# Altium PCB Feather-ATMega328 - WIFI.PcbDoc
Units mm, origin at the board's own origin, x right, y up, seen from the top; angles counter-clockwise.
Board outline 50 x 25 mm, 2 copper layers (Top Layer, Bottom Layer); 54 components, 49 nets, 194 pads, 87 vias.
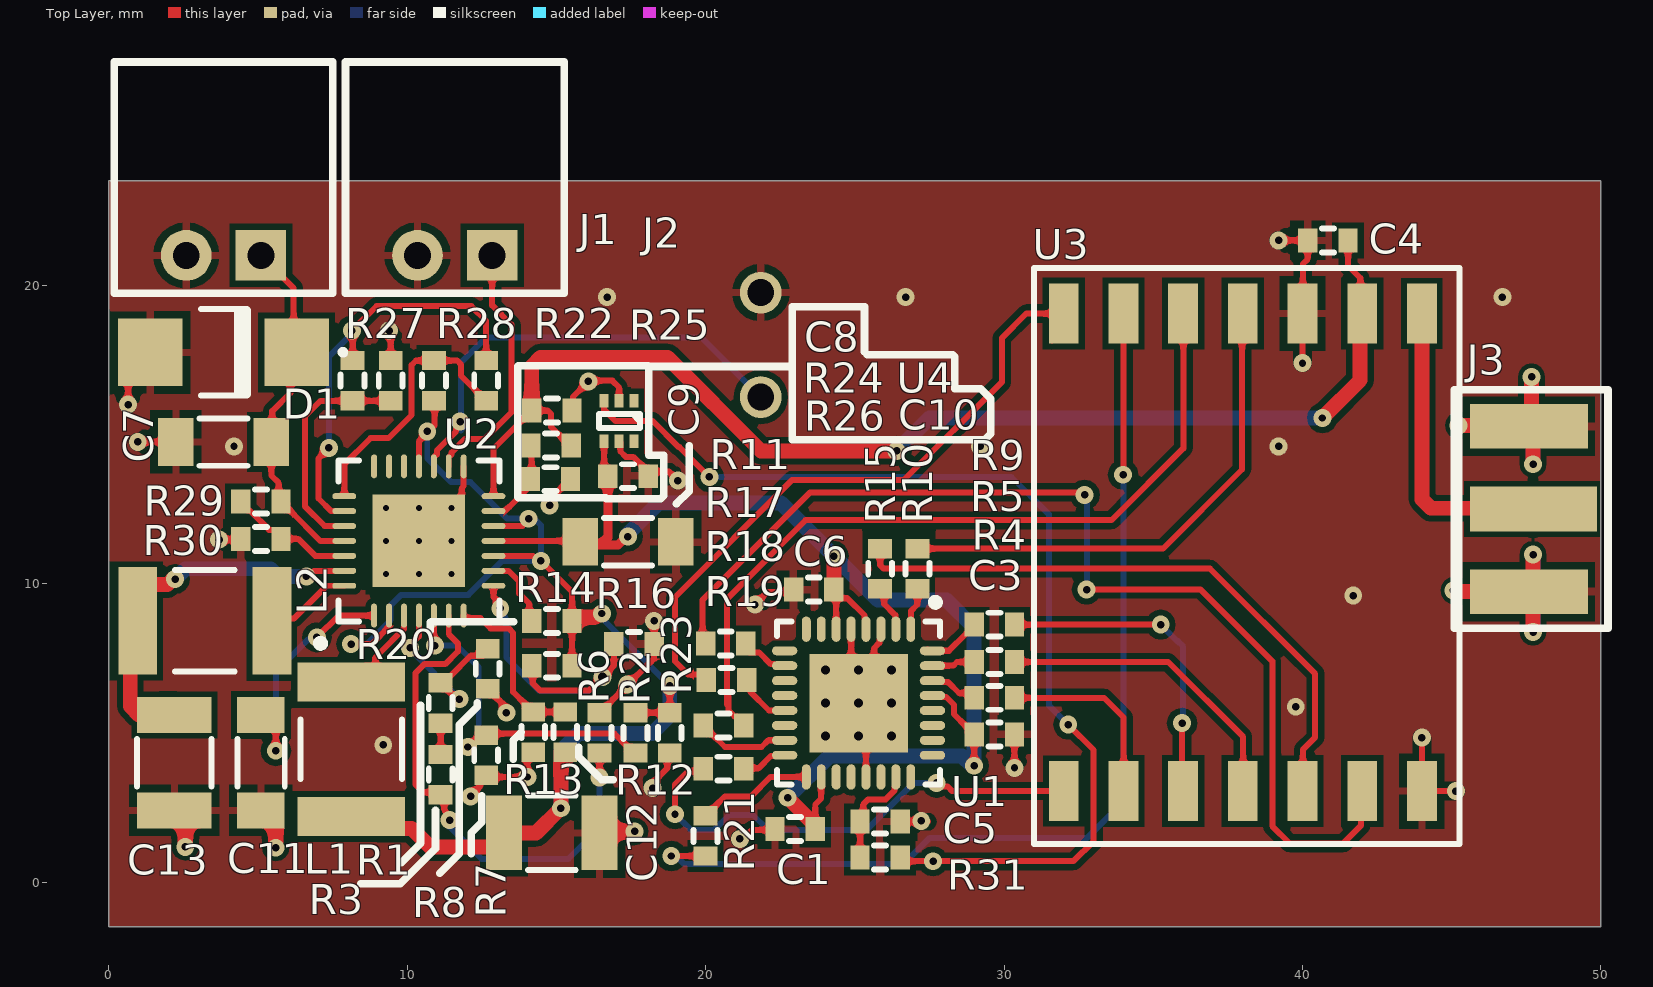
[diagram p0: Top Layer view]
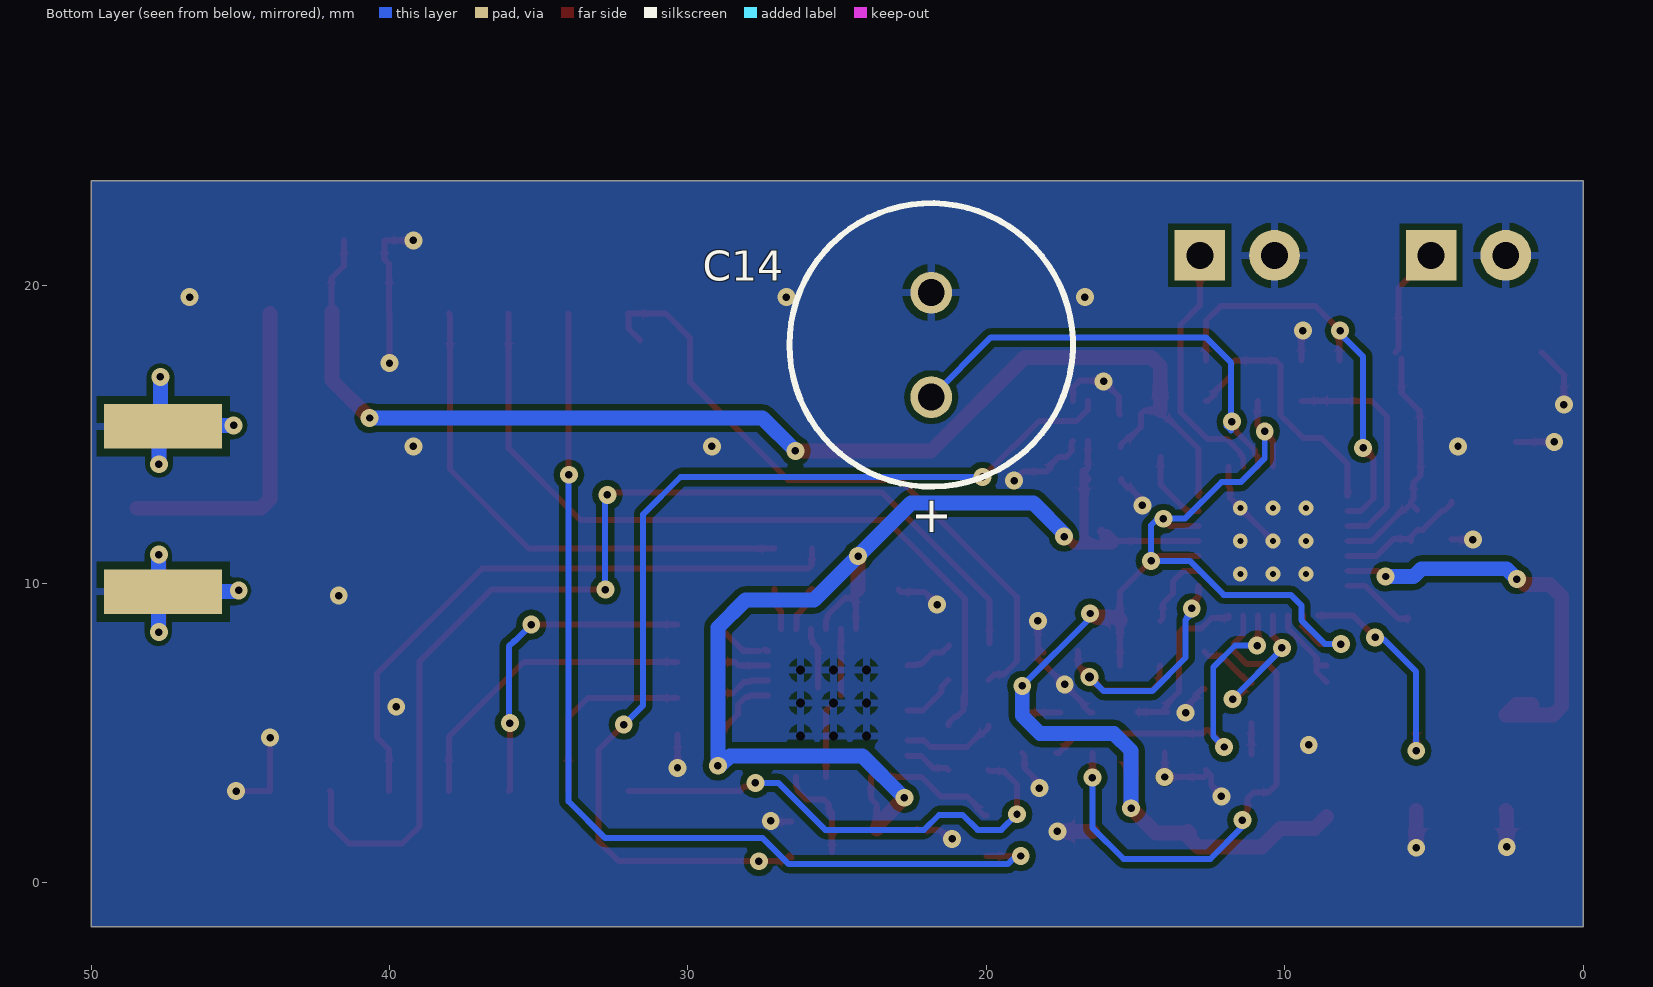
[diagram p1: Bottom Layer view, seen from below]
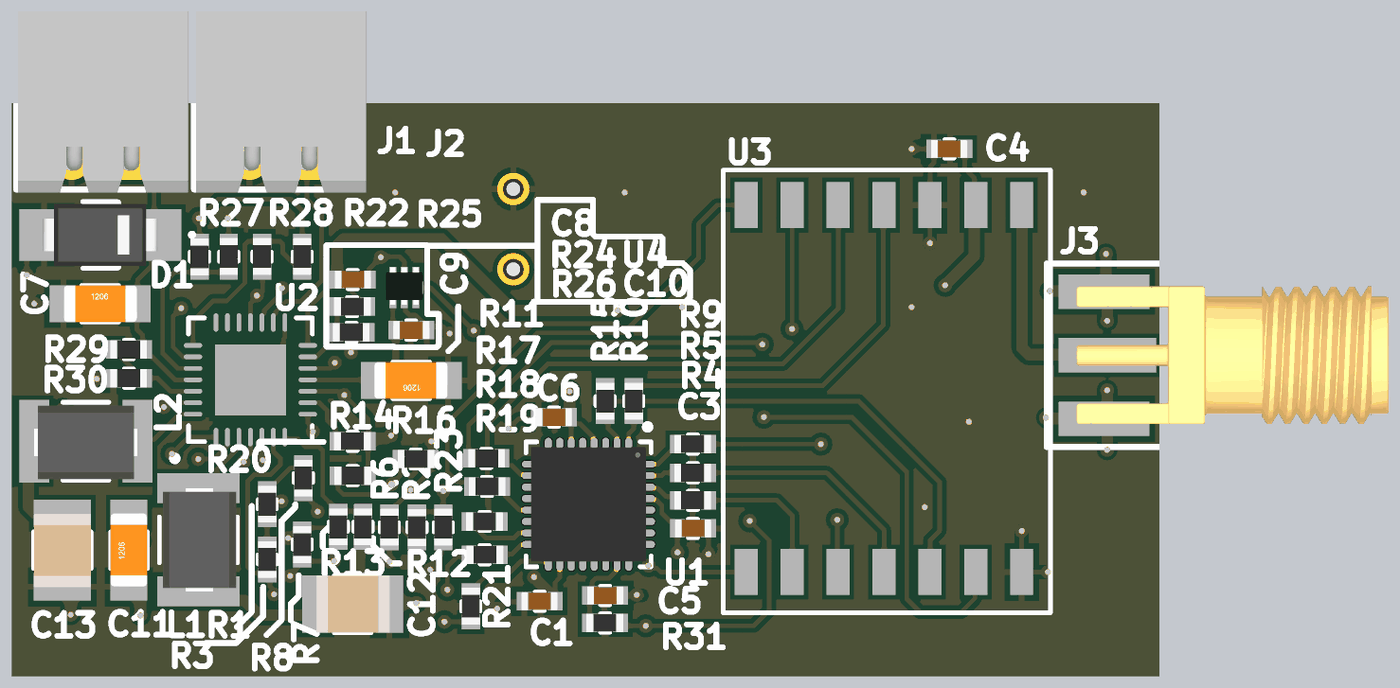
[diagram p2: 3D render of the assembled board from above, using the file's embedded part models]

## Layer stack, top to bottom
Top Solder: solder mask 0.0102, Solder Resist, Dk 3.5
Top Layer: signal copper 0.0356
Dielectric 1: dielectric 0.32, FR-4, Dk 4.8
Bottom Layer: signal copper 0.0356
Bottom Solder: solder mask 0.0102, Solder Resist, Dk 3.5

## Board outline
0,-1.5 50,-1.5 50,23.5 0,23.5

## Design rules (kind name [scope] priority, off if disabled: settings)
Clearance [All] p1: gap=0.2 ignorepadtopadclearanceinfootprint=FALSE except(0: Arc-Hole Track-Hole SMDPad-Hole THPad-Hole Via-Hole Fill-Hole Poly-Hole Region-Hole Text-Hole)
PlaneConnect [All] p1: pad.planeconnectstyle=Relief pad.reliefexpansion=0.508 pad.reliefentries=4 pad.reliefconductorwidth=0.254 pad.reliefairgap=0.254 via.planeconnectstyle=Direct via.reliefexpansion=0.508 via.reliefentries=4 via.reliefconductorwidth=0.254 via.reliefairgap=0.254
PolygonConnect [All] p1: thpad.connectstyle=Relief thpad.reliefconductorwidth=0.254 thpad.reliefentries=4 thpad.polygonreliefangle="90 Angle" thpad.airgapwidth=0.254 smdpad.connectstyle=Relief smdpad.reliefconductorwidth=0.254 smdpad.reliefentries=4 smdpad.polygonreliefangle="90 Angle" smdpad.airgapwidth=0.254 via.connectstyle=Direct via.reliefconductorwidth=0.254 via.reliefentries=4 via.polygonreliefangle="90 Angle" via.airgapwidth=0.254
RoutingVias [All] p1: holewidth=0.25 width=0.6 viastyle="Through Hole" minholewidth=0.25 minwidth=0.6 maxholewidth=0.25 maxwidth=0.6
SolderMaskExpansion [isVia] p1: expansion=0.102 istentingtop=TRUE
Width [All] p1: maxlimit=0.5 minlimit=0.2 preferedwidth=0.2 minimp=50.000000 maximp=50.000000 favimp=50.000000
29 further rules are at their usual default settings.

## Components (designator, comment, footprint, x,y, rotation, side; value= is the part's Value field where it differs from the comment)
C1 "Capacitor" C0603 23,1.775 r0 top value=100nF
C3 "Capacitor" C0603 29.675,4.95 r180 top value=100nF
C4 "Capacitor" C0603 40.85,21.5 r0 top value=100nF
C5 "Capacitor" C0603 25.85,2.025 r180 top value=100nF
C6 "Capacitor" C0603 23.625,9.8 r0 top value=100nF
C7 "Capacitor" C1206 3.85,14.75 r0 top value=22uF
C8 "Capacitor" C0603 14.85,15.8 r180 top value=100nF
C9 "Capacitor" C1206 17.4,11.4 r180 top value=10uF
C10 "Capacitor" C0603 17.4,13.6 r180 top value=100nF
C11 "Capacitor" C1206 5.1,4 r90 top value=22uF
C12 "Capacitor" C1210 14.85,1.65 r180 top value=10uF
C13 "Capacitor" C1210 2.2,4 r90 top value=10uF
C14 "Electrolytic" WCAP-STSC_D8xH20mm 21.85,18 r270 bottom value="3F 2,7V"
D1 "SMBJ5.0CA" DO-214AA 3.85,17.75 r180 top
J1 "1x2 Socket Header" "MOLEX 22-05-7025" 3.85,21 r0 top
J2 "1x2 Socket Header" "MOLEX 22-05-7025" 11.6,21 r0 top
J3 "132322" SMA_Edge_132322 47.735,12.5 r270 top
L1 "B82432T1103K" L1812-T 8.125,4.45 r270 top value="10uH 0,650A"
L2 "B82432T1103K" L1812-T 3.225,8.75 r180 top value="10uH 0,650A"
R1 "Resistor" R0603 11.125,6 r270 top value=4k7
R2 "Resistor" R0603 17.65,5 r90 top value=4k7
R3 "Resistor" R0603 11.125,3.6 r90 top value=4k7
R4 "Resistor" R0603 29.675,6.175 r0 top value=100R
R5 "Resistor" R0603 29.675,7.375 r0 top value=100R
R6 "Resistor" R0603 16.45,5 r270 top value=1k
R7 "Resistor" R0603 12.65,4.25 r90 top value=1k
R8 "Resistor" R0603 12.7,7.15 r90 top value=1k
R9 "Resistor" R0603 29.675,8.625 r0 top value=100R
R10 "Resistor" R0603 27.1,10.5 r90 top value=100R
R11 "Resistor" R0603 20.675,8 r180 top value=100R
R12 "Resistor" R0603 15.3,5.025 r90 top value=0R
R13 "Resistor" R0603 14.225,5.025 r90 top value=0R
R14 "Resistor" R0603 14.85,7.25 r180 top value=0R
R15 "Resistor" R0603 25.85,10.5 r90 top value=100R
R16 "Resistor" R0603 17.6,7.975 r180 top value=0R
R17 "Resistor" R0603 20.7,6.775 r180 top value=100R
R18 "Resistor" R0603 20.6,5.25 r0 top value=100R
R19 "Resistor" R0603 20.6,3.8 r180 top value=100R
R20 "Resistor" R0603 14.85,8.75 r0 top value=1k
R21 "Resistor" R0603 20,1.55 r270 top value=100R
R22 "Resistor" R0603 10.9,16.8 r270 top value=1k
R23 "Resistor" R0603 18.8,5 r270 top value=1k
R24 "Resistor" R0603 14.825,14.625 r180 top value=1k
R25 "Resistor" R0603 12.65,16.8 r270 top value=1k
R26 "Resistor" R0603 14.8,13.5 r0 top value=1k
R27 "Resistor" R0603 8.175,16.8 r90 top value=1k
R28 "Resistor" R0603 9.45,16.8 r270 top value=1k
R29 "Resistor" R0603 5.1,12.75 r0 top value=1k
R30 "Resistor" R0603 5.1,11.5 r0 top value=1k
R31 "Resistor" R0603 25.85,0.825 r0 top value=100R
U1 "ATMEGA328P" QFN32 25.125,6 r270 top
U2 "AEM10941" QFN28 10.395,11.43 r90 top
U3 "433 MHz" RFM69CW 29,19.05 r270 top
U4 "TMP20" SOT-563 17.6,16.125 r180 top

## Footprints (in the part's own frame and the unit in brackets; to place one, negate y for a bottom-side part, rotate by r counter-clockwise, add the part's x,y. Pads: shape width x height; smd on the part's side, far side on the other; paste and mask are expansions set on the pad)
C0603 [mm] "Chip Capacitor, Body 1.6x0.8mm, IPC High Density"
  rect 0.65x0.8 smd: 1(-0.675,0) 2(0.675,0)
  silkscreen extent -0.2,-0.4 0.2,0.4, body extent -0.81,-0.4 0.79,0.4, height 0.6
C1206 [mm] "Chip Capacitor, Body 3.2x1.6mm, IPC High Density"
  rect 1.2x1.6 smd: 1(-1.6,0) 2(1.6,0)
  silkscreen extent -0.8,-0.8 0.8,0.79, body extent -1.59,-0.8 1.61,0.8, height 1
C1210 [mm] "Chip Capacitor, Body 3.2x2.5mm, IPC High Density"
  rect 1.2x2.5 smd: 1(-1.6,0) 2(1.6,0)
  silkscreen extent -0.8,-1.25 0.8,1.25, body extent -1.62,-1.25 1.58,1.25, height 0.39
DO-214AA [mm] "SOJ, 2-Leads, Body 3,94x5,40mm, Pitch 1,27mm, IPC Medium Density"
  rect 2.16x2.26 smd: A(2.45,0) K(-2.45,0)
  silkscreen extent -4.05,-1.45 0.76,1.45, body extent -2.5,-1.35 2.5,1.35, height 2.41
L1812-T [mm] "Inductor Molded 1812, 4.5x3.2mm"
  rect 1.3x3.6 smd: 1(-2.25,0) 2(2.25,0)
  silkscreen extent -1,-1.7 1,1.7, body extent -2.25,-1.55 2.25,1.65, height 3.2
"MOLEX 22-05-7025" [mm]
  rect 1.7x1.7 hole 0.9: 1(1.25,0)
  round 1.7 hole 0.9: 2(-1.25,0)
  silkscreen extent -3.66,-1.27 3.66,6.48, body extent -3.57,-1.4 3.83,6.5, height 4.95
QFN28 [mm] "QFN, 28-Leads, Body 5,00x5,00mm, Pitch 0,50mm, Thermal Pad 3,10x3,10mm, IPC Medium Density"
  oval 0.8x0.2 smd: 1(-2.5,1.5) 2(-2.5,1) 3(-2.5,0.5) 4(-2.5,0) 5(-2.5,-0.5) 6(-2.5,-1) 7(-2.5,-1.5) 15(2.5,-1.5) 16(2.5,-1) 17(2.5,-0.5) 18(2.5,0) 19(2.5,0.5) 20(2.5,1) 21(2.5,1.5)
  oval 0.2x0.8 smd: 8(-1.5,-2.5) 9(-1,-2.5) 10(-0.5,-2.5) 11(0,-2.5) 12(0.5,-2.5) 13(1,-2.5) 14(1.5,-2.5) 22(1.5,2.5) 23(1,2.5) 24(0.5,2.5) 25(0,2.5) 26(-0.5,2.5) 27(-1,2.5) 28(-1.5,2.5)
  rect 3.1x3.1 smd: 29(0,0)
  silkscreen extent -3.55,-2.7 2.7,3.42, body extent -2.55,-2.55 2.55,2.55, height 1
QFN32 [mm] "QFN, 32-Leads, Body 5x5mm, Pitch 0.5mm, Thermal Pad 3.3x3.3mm, IPC High Density"
  oval 0.85x0.3 smd mask+0.05: 1(-2.475,1.75) 2(-2.475,1.25) 3(-2.475,0.75) 4(-2.475,0.25) 5(-2.475,-0.25) 6(-2.475,-0.75) 7(-2.475,-1.25) 8(-2.475,-1.75) 17(2.475,-1.75) 18(2.475,-1.25) 19(2.475,-0.75) 20(2.475,-0.25) 21(2.475,0.25) 22(2.475,0.75) 23(2.475,1.25) 24(2.475,1.75)
  oval 0.3x0.85 smd mask+0.05: 9(-1.75,-2.475) 10(-1.25,-2.475) 11(-0.75,-2.475) 12(-0.25,-2.475) 13(0.25,-2.475) 14(0.75,-2.475) 15(1.25,-2.475) 16(1.75,-2.475) 25(1.75,2.475) 26(1.25,2.475) 27(0.75,2.475) 28(0.25,2.475) 29(-0.25,2.475) 30(-0.75,2.475) 31(-1.25,2.475) 32(-1.75,2.475)
  rect 3.3x3.3 smd mask+0.05: 33(0,0)
  round 0.2 hole 0.3 paste+0 mask+0: ""(-1.1,1.1) ""(-1.1,0) ""(-1.1,-1.1) ""(0,1.1) ""(0,0) ""(0,-1.1) ""(1.1,1.1) ""(1.1,0) ""(1.1,-1.1)
  silkscreen extent -3.5,-2.73 2.73,2.72, body extent -2.52,-2.51 2.5,2.51, height 0.8
R0603 [mm] "Chip Resistor, Body 1.6x0.8mm, IPC High Density"
  rect 0.65x0.8 smd: 1(-0.675,0) 2(0.675,0)
  silkscreen extent -0.2,-0.4 0.2,0.4, body extent -0.81,-0.4 0.79,0.4, height 0.4
RFM69CW [mm]
  rect 2x1 smd: 1(0,15) 2(0,13) 3(0,11) 4(0,9) 5(0,7) 6(0,5) 7(0,3) 8(16,3) 9(16,5) 10(16,7) 11(16,9) 12(16,11) 13(16,13) 14(16,15)
  silkscreen extent -1.52,2 17.78,16.26
SMA_Edge_132322 [mm] "SMA for PCB edge for boards with 1.6mm (0.062 inch)"
  rect 1.5x4.25 smd: 1(0,0)
  rect 1.5x3.95 smd: G(-2.77,-0.15) G(2.77,-0.15)
  rect 1.5x3.95 smd far side: G(-2.77,-0.15) G(2.77,-0.15)
  silkscreen extent -4,-2.65 4,2.5, body extent -3,-1.35 3,12.25, height 3.45
SOT-563 [mm]
  rect 0.3x0.45 smd: 1(0,0) 2(0.5,0) 3(1,0) 4(1,1.35) 5(0.5,1.35) 6(0,1.35)
  silkscreen extent -0.26,0.44 1.17,0.91, body extent -0.3,-0.2 1.3,1.43, height 0.58
WCAP-STSC_D8xH20mm [mm] "Supercapacitors, THT, body diameter 8mm"
  round 1.4 hole 0.9: 1(-1.75,0) 2(1.75,0)
  silkscreen extent -4.75,-4.75 4.75,4.75, body extent -3.99,-4 4,4, height 20.31

## Part data
C1 C3 C4 C5 C6 C8 C10: library part C0603_100nF_16V_±10%, "Capacitor SMD", Capacitance=100nF, Dielectric=X7R, Manufacturer=Kemet, Supplier Part Number 1=399-1096-1-ND, Temp_ Max=125, Temp_ Min=-55, Tolerance=±10%, Voltage=16V, OrderingCode=C0603C104K4RAC, Part Number=C0603_100nF_16V_±10%, Price (€)=0,012, Supplier 1=Digikey
C7: library part C1206_22uF_10V_±10%, "Capacitor SMD", Capacitance=22uF, Dielectric=X7R, Manufacturer="Taiyo Yuden", Supplier Part Number 1=963-LMK316AB7226KLTR, Temp_ Max=125, Temp_ Min=-55, Tolerance=±10%, Voltage=10V, OrderingCode=LMK316AB7226KL-TR, Part Number=C1206_22uF_10V_±10%, Price (€)=0,163, Supplier 1=Mouser, Supplier 2=Farnell
C9: library part C1206_10uF_25V_±10%, "Capacitor SMD", Capacitance=10uF, Dielectric=X7R, Manufacturer=Kemet, Supplier Part Number 1=80-C1206C106K3R, Temp_ Max=125, Temp_ Min=-55, Tolerance=±10%, Voltage=25V, OrderingCode=C1206C106K3RACTU, Part Number=C1206_10uF_25V_±10%, Price (€)=0,5, Supplier 1=Mouser, Supplier 2=Farnell, Supplier Part Number 2=2118134
C11: library part C1206_22uF_25V_±10%, "Capacitor SMD", Capacitance=22uF, Dielectric=X5R, Manufacturer=TDK, Supplier Part Number 1=810-C3216X5R1E226M, Temp_ Max=85, Temp_ Min=-55, Tolerance=±10%, Voltage=25V, OrderingCode=C3216X5R1E226M160AB, Part Number=C1206_22uF_25V_±10%, Price (€)=0,8, Supplier 1=Mouser, Supplier 2=Farnell, Supplier Part Number 2=2525169
C12 C13: library part C1210_10uF_50V_±10%, "Capacitor SMD", Capacitance=10uF, Dielectric=X7R, Manufacturer="Taiyo Yuden", Supplier Part Number 1=710-885012209029, Temp_ Max=125, Temp_ Min=-55, Tolerance=±10%, Voltage=50V, OrderingCode=885012209029, Part Number=C1210_10uF_50V_±10%, Supplier 1=Mouser, Supplier 2=Digi-Key, Supplier Part Number 2=732-12289-1-ND
C14: library part 850617030001, "Capacitor, Electrolytic, THT", Capacitance=3F, Manufacturer=Wurth, Supplier #1 Part Number=710-850617030001, Supplier #2 Part Number=2985561, Temp_ Max=65, Temp_ Min=-40, Voltage=2,7V, OrderingCode=850617030001, Part Number=850617030001, Supplier #1=Mouser, Supplier #2=Farnell
D1: library part "TVS Bidir 5Vdc", "Protection, Bidirectional Transient Suppression Diodes", Breakdown Voltage="6,4 Vdc", Manufacturer=Littelfuse, Overvoltage Current=65,3A, Supplier Part Number 1=576-SMBJ5.0CA, Temp_ Max=150, Temp_ Min=-65, Voltage=5Vdc, OrderingCode=SMBJ5.0CA, Part Number="TVS Bidir 5Vdc", Price (€)=1827692, Supplier 1=Mouser, Supplier 2=Farnell, Supplier Part Number 2=1827692
J1 J2: library part "Molex - 2 pin", "Connector, 2 pin Socket Header", Manufacturer=Molex, Supplier Part Number 1=538-22-05-7025, Temp_Max=105, Temp_Min=-40, Idc=3A, OrderingCode=22057025, Part Number="Molex - 2 pin", Supplier 1=Mouser, Supplier 2=Farnell, Supplier Part Number 2=9979670
J3: library part SMA_Edge_132322, "Coax", Manufacturer="FCI Amphenol", Supplier Part Number 1=523-132322, OrderingCode=132322, Part Number=SMA_Edge_132322, Price (€)=4,39, Supplier 1=Mouser, Supplier 2=Farnell
L1 L2: library part 10uH_0,650A, "Inductor, Power, SMD", Current=0,650A, Manufacturer=Epcos, Temp_ Max=85, Temp_ Min=-40, L=10uH, OrderingCode=B82432T1103K, Part Number=10uH_0,650A, Price (€)=0,48, Rdc=0,350R
R1 R2 R3: library part R0603_4k7_0.1W_±1%, "Resistor, SMD", Manufacturer=Vishay, Power=0.1W, Resistance=4k7, Supplier Part Number 1=71-CRCW0603-4.7K-E3, Temp_ Max=155, Temp_ Min=-55, Tolerance=±1%, OrderingCode=CRCW06034K70FK, PackageDescription=SMD, Part Number=R0603_4k7_0.1W_±1%, Price=0,014, Supplier 1=Mouser, Supplier 2=Digikey, Supplier Part Number 2=541-4.70KHDKR-ND
R4 R5 R9 R10 R11 R15 R17 R18 R19 R21 R31: library part R0603_100R_0.1W_±1%, "Resistor, SMD", Manufacturer=Vishay, Power=0.1W, Resistance=100R, Supplier Part Number 1=71-CRCW0603-100-E3, Temp_ Max=155, Temp_ Min=-55, Tolerance=±1%, OrderingCode=CRCW0603100RFK, PackageDescription=SMD, Part Number=R0603_100R_0.1W_±1%, Price=0,014, Supplier 1=Mouser, Supplier 2=Digikey, Supplier Part Number 2=541-100HCT-ND
R6 R7 R8 R20 R22 R23 R24 R25 R26 R27 R28 R29 R30: library part R0603_1k_0.1W_±1%, "Resistor, SMD", Manufacturer=Vishay, Power=0.1W, Resistance=1k, Supplier Part Number 1=71-CRCW0603-1.0K-E3, Temp_ Max=155, Temp_ Min=-55, Tolerance=±1%, OrderingCode=CRCW06031K00FK, PackageDescription=SMD, Part Number=R0603_1k_0.1W_±1%, Price=0,014, Supplier 1=Mouser, Supplier 2=Digikey, Supplier Part Number 2=541-1.00KHCT-ND
R12 R13 R14 R16: library part R0603_0R_0.1W_±5%, "Resistor, SMD", Manufacturer=Vishay, Power=0.1W, Resistance=0R, Temp_ Max=155, Temp_ Min=-55, Tolerance=±5%, OrderingCode=CRCW06030000Z0, PackageDescription=SMD, Part Number=R0603_0R_0.1W_±5%, Price=0,003
U1: library part ATMEGA328P-QFN, "Processor, 8-bit AVR Microcontroller", Manufacturer=Atmel, Supplier #1 Part Number=556-ATMEGA328P-MU, Supplier #2 Part Number=ATMEGA328P-MU-ND, Temp_ Max=85, Temp_ Min=-40, OrderingCode=ATMEGA328P-MU, Part Number=ATMEGA328P-QFN, Supplier #1=Mouser, Supplier #2=Digi-Key
U2: "Highly-efficient, regulated dual-output, ambient energy manager  for up to 7-cell solar panels with optional primary battery", Manufacturer=E-PEAS, Temp_ Max=125, Temp_ Min=-40, OrderingCode=AEM10941, Part Number=AEM10941, Supplier 1=E-PEAS, Supplier Part Number 1=AEM10941
U3: library part RFM69CW, "RFM69CW SMD Wireless Transceiver - 433 MHz", Frequency=433MHz, OrderingCode=RFM69CW, Part Number=RFM69CW, Supplier Part Number 1=RFM69CW
U4: "TMP20 ±2.5°C Low-Power, Analog Out Temperature Sensor", Manufacturer="Texas Instruments", Supplier Part Number 1=595-TMP20AIDRLT, Temp_ Max=125, Temp_ Min=-55, OrderingCode=TMP20AIDRLT, Part Number=TMP20, Supplier 1=Mouser, Supplier 2=Farnell, Supplier Part Number 2=1815753

## Via types
v1: diameter 0.6, hole 0.25, Top Layer to Bottom Layer, tented both sides, 77 vias
v2: diameter 0.5, hole 0.2, Top Layer to Bottom Layer, tented both sides, 9 vias
v3: diameter 0.6, hole 0.3, Top Layer to Bottom Layer, tented both sides, 1 vias

## Nets (pads, with @x,y where several pads share a name; then routed paths per layer and width w, separated by ;. In a path a pad name is that pad's centre, name@x,y a point inside that pad or via, vN(x,y) a via of type N, cw(c..) or ccw(c..) an arc to the next point about the centre after c; other vN are vias at no path point)
CFG0: R3.1 R6.2 U2.6 | length 17.6
  Top Layer w0.2: U2.6 11.395,8.306 11.7,8.001 11.7,7.725 11.275,7.3 10.576,7.3 10.275,6.999 10.275,3.275 10.542,3.008 11.042,3.008 11.245,2.805 11.245,2.417 11.588,2.075 v1(11.425,2.075) ; v1(16.45,3.5) R6.2
  Bottom Layer w0.2: v1(11.425,2.075) 11.425,1.85 12.5,0.775 15.4,0.775 16.45,1.825 v1(16.45,3.5)
CFG1: R2.1 R7.2 U2.5 | length 11.8
  Top Layer w0.2: U2.5 10.895,7.961 v1(10.93,7.926) ; v1(12.037,4.527) 12.037,4.532 12.35,4.845 12.35,4.875 12.575,5.1 12.65,5.1 12.775,4.975 14.626,4.975 16.949,4.975 17.35,4.574 17.35,4.55 17.575,4.325 R2.1
  Bottom Layer w0.2: v1(10.93,7.926) 11.674,7.926 12.4,7.2 12.4,4.89 v1(12.037,4.527)
CFG2: R1.1 R8.2 U2.4 | length 6.5
  Top Layer w0.2: v1@10.111,7.816 10.101,7.826 v1(10.101,7.85) 10.101,7.938 10.395,8.232 U2.4 ; R1.1 R1.1@11.2,6.675 ; v1(11.75,6.132) 11.668,6.132 11.425,6.375 11.425,6.45 R1.1@11.2,6.675 ; R8.2@12.7,7.725 12.552,7.576 12.117,7.576 11.441,6.9 11.425,6.9 R1.1@11.2,6.675
  Bottom Layer w0.2: v1(10.101,7.85) 10.101,7.799 11.75,6.15 v1(11.75,6.132)
CHRDY: R25.1 R27.2 U2.23 | length 14.5
  Top Layer w0.2: v1(7.379,14.55) 7.029,14.2 7.029,12.854 7.453,12.43 U2.23 ; R27.2 8.175,18.45 v1(8.15,18.475) 8.975,19.3 12.15,19.3 12.65,18.8 R25.1
  Bottom Layer w0.2: v1(7.379,14.55) 7.379,17.604 8.15,18.375 v1(8.15,18.475)
GND: C1.1 C3.1 C4.1 C5.1 C6.1 C7.1 C8.1 C9.1 C10.1 C11.1 C12.1 C13.1 C14.1 D1.A J1.2 J2.2 J3.G R6.1 R7.1 R8.1 R13.1 R16.1 R23.2 R26.2 R28.1 R30.1 U1. U1.3 U1.5 U1.21 U1.33 U2.15 U2.29 U3.3 U3.14 U4.2 U4.5 | length 69.6
  Top Layer w0.2: D1.A@0.625,16.975 D1.A@0.65,17 ; v1(0.65,16) D1.A@0.65,17 ; v1(0.975,14.75) C7.1 ; D1.A D1.A@0.65,17 ; v1(3.7,11.475) 4.4,11.475 R30.1 ; v1(9.4,18.475) 9.45,18.425 R28.1 ; v2(10.395,11.43) v2(11.495,12.53) 11.837,12.872 11.837,13.212 11.895,13.27 U2.15 ; v1(12.126,2.875) 12.126,2.901 12.467,3.242 12.467,3.567 R7.1@12.65,3.75 ; R7.1 12.703,3.522 v1@14.025,3.522 ; R8.1 R8.1@12.775,6.475 ; v1(13.325,5.675) 13.248,5.752 13.248,5.927 13,6.175 R8.1@13,6.25 ; v1@13.925,3.515 v1@14.025,3.515 ; R13.1@14.025,4.35 v1@14.025,3.522 ; v1(14.775,12.625) 14.775,12.8 15.175,13.2 15.25,13.2 15.475,13.425 R26.2 ; C8.1@15.525,15.675 15.558,15.708 15.558,16.258 v1(16.075,16.775) 16.1,16.8 16.875,16.8 17.1,16.575 U4.2 ; R6.1 16.525,5.675 16.75,5.9 16.75,5.975 18.275,7.5 R16.1@18.275,7.875 ; U4.5 17.15,14.725 17.15,14.426 17.326,14.25 17.575,14.25 17.85,13.975 17.85,13.9 18,13.75 18.775,13.75 v1(19.075,13.45) ; R16.1@18.088,7.688 R16.1@18.275,7.875 ; v1(18.225,3.15) 18.225,3.325 18.717,3.817 18.717,4.242 R23.2 ; v1(18.275,8.75) R16.1 R16.1@18.275,7.875 ; v1(21.15,1.45) 21.267,1.45 21.567,1.75 22.3,1.75 C1.1 ; v1(21.65,9.3) 22.075,9.725 22.875,9.725 C6.1 ; U1.33@24.875,6.25 U1.5 ; U1.33 25.375,5.75 U1.21 ; U1.33@25.644,6.519 25.644,7.833 25.825,8.014 25.825,8.123 25.875,8.173 U1.3 ; C5.1 v1@27.451,2.025 ; v1(30.35,3.825) C3.1 ; v1(39.2,21.5) C4.1 40.175,20.875 40.01,20.71 U3.3@40.01,19.05 ; v1(40,17.39) U3.3 ; v1(44,4.84) U3.14 v1(45.14,3.05) ; R8.1@12.775,6.475 R8.1@13,6.25 ; R8.1@12.775,6.475 R8.1@13,6.25 ; v1@14.025,3.515 v1@14.025,3.522 ; v1@14.025,3.515 v1(14.032,3.522) v1@14.025,3.522
  Top Layer w0.5: v1(2.568,1.182) 2.568,2.368 C13.1@2.6,2.4 ; v1(5.6,1.15) C11.1@5.6,2.4 ; C12.1@16.45,1.7 v1(17.625,1.7) ; v1@45.077,9.775 45.109,9.743 47.572,9.743 47.585,9.73 47.725,9.59 v1(47.725,8.375) ; v1(45.225,15.3) 47.555,15.3 47.585,15.27 47.725,15.13 v1(47.725,14) ; J3.G@47.675,15.36 v1(47.675,16.925) ; J3.G@47.725,9.87 v1(47.725,10.975)
  Bottom Layer w0.2: v1@14.032,3.507 v1(14.032,3.522)
  Bottom Layer w0.5: v1@45.098,9.764 45.131,9.731 47.594,9.731 47.606,9.719 47.746,9.579 v1@47.746,8.364 ; v1(45.225,15.3) 47.555,15.3 47.585,15.27 47.725,15.13 v1(47.725,14) ; J3.G@47.675,15.36 v1(47.675,16.925) ; J3.G@47.746,9.859 v1@47.746,10.964
  other v1: 27.225,2.05 9.2,4.6 39.775,5.875 17.375,6.625 41.7,9.6 45.05,9.775 4.2,14.6 29.2,14.6 39.2,14.6 16.7,19.6 26.7,19.6 46.7,19.6
  other v2: 9.295,10.33 10.395,10.33 11.495,10.33 9.295,11.43 11.495,11.43 9.295,12.53 10.395,12.53
LDO_STATUS: U2.21
MISO: R19.2 U3.8 | length 16.6
  Top Layer w0.2: v1(18.976,2.275) 18.976,3.276 19.417,3.717 19.892,3.717 R19.2@19.925,3.75 ; v1(27.741,3.325) 27.856,3.21 28.105,3.21 28.265,3.05 U3.8 U3.8@31.998,3.048
  Bottom Layer w0.2: v1(18.976,2.275) 19.501,1.75 20.296,1.75 20.796,2.25 21.59,2.25 22.09,1.75 25.4,1.75 26.975,3.325 v1@27.751,3.325
MOSI: R18.2 U3.5 | length 26.7
  Top Layer w0.2: 20.725,5.95 20.725,6.225 20.725,8.914 20.725,9.17 20.725,9.5 23.35,12.125 33.6,12.125 36.01,14.535 U3.5@36.01,19.05 ; 20.775,6.225 20.775,5.95 20.775,5.75 20.975,5.55 21.05,5.55 21.275,5.325 R18.2
MPP_STATUS: U2.19
NCS: R17.2 U3.7 | length 22.3
  Top Layer w0.2: R17.2@19.925,6.775 19.742,6.958 19.417,6.958 18.975,7.4 18.975,9.55 22.9,13.475 26.65,13.475 29.925,16.75 29.925,18.225 30.75,19.05 U3.7@32.01,19.05 ; U3.7@31.6,18.15 32,18.55 U3.7
NetC5_2: C5.2 R31.1 U1.23 | length 3.5
  Top Layer w0.2: R31.1@25.175,1 C5.2 C5.2@25.175,2.25 ; C5.2@25.175,2.325 C5.2@25.175,2.25 ; U1.23 26.375,3.223 26.325,3.173 26.325,3.064 26.036,2.775 25.45,2.775 25.283,2.608 25.283,2.325 25.208,2.25 C5.2@25.175,2.25
NetC7_2: C7.2 D1.K J1.1 R29.2 U2.25 | length 11.9
  Top Layer w0.2: J1.1 6.2,19.9 6.2,17.85 D1.K ; C7.2@5.446,14.746 C7.2 ; R29.2@5.575,12.475 R29.2@5.775,12.675 ; D1.K@6.091,17.541 6.091,16.391 5.479,15.779 5.479,14.779 C7.2 ; U2.25 7.095,11.43 6.075,12.45 6,12.45 R29.2@5.775,12.675 ; C7.2 5.45,13.625 5.696,13.379 5.696,12.829 R29.2 R29.2@5.775,12.675
NetC13_2: C13.2 L2.2 U2.27 | length 15.1
  Top Layer w0.2: v1(6.625,10.24) 6.69,10.24 6.88,10.43 U2.27
  Top Layer w0.5: v1(2.225,10.15) 2.144,10.15 1.963,9.969 1.125,9.969 0.725,9.569 0.725,5.893 1.018,5.6 C13.2@2.068,5.6 ; C13.2@2.068,5.6 2.6,5.6 2.25,5.95 1.718,5.95 C13.2@2.068,5.6
  Bottom Layer w0.2: v1@6.625,10.1 v1(6.625,10.24)
  Bottom Layer w0.5: v1(2.225,10.15) 2.575,10.5 5.425,10.5 5.685,10.24 v1(6.625,10.24)
NetC14_2: C14.2 U2.17 | length 15.8
  Top Layer w0.2: U2.17 10.895,14.23 10.995,14.33 10.995,14.461 11.643,15.11 11.643,15.187 11.775,15.318 v1(11.775,15.427)
  Bottom Layer w0.2: v1(11.775,15.427) 11.807,15.427 11.95,15.283 11.8,15.133 11.8,17.4 12.65,18.25 19.85,18.25 C14.2
NetJ3_1: J3.1 U3.1 | length 10.8
  Top Layer w0.5: U3.1@44.01,19.05 44.01,12.818 44.303,12.525 J3.1@48.456,12.525
NetL1_1: L1.1 U2.3 | length 3.1
  Top Layer w0.2: L1.1@8.6,6.7 8.94,7.04 L1.1@8.94,7.25 ; L1.1@8.6,7.25 L1.1@8.94,7.25 ; U2.3 9.895,8.488 9.857,8.45 9.852,8.45 9.501,8.099 9.501,8.093 8.94,7.533 L1.1@8.94,7.25
NetL2_1: L2.1 U2.28 | length 2.5
  Top Layer w0.2: L2.1@5.85,8.829 6.204,8.829 7.305,9.93 U2.28
NetR1_2: R1.2 R3.2 | length 1
  Top Layer w0.2: R3.2 R1.2
NetR4_1: R4.1 U1.30 | length 2.2
  Top Layer w0.2: U1.30@27.325,6.75 U1.30@27.85,6.75 ; U1.30 27.902,6.75 27.952,6.7 28.127,6.7 28.492,6.335 28.84,6.335 R4.1
NetR5_1: R5.1 U1.31 | length 2.1
  Top Layer w0.2: U1.31@27.325,7.25 U1.31@27.975,7.25 ; U1.31 28.3,7.25 28.425,7.375 R5.1
NetR9_1: R9.1 U1.32 | length 2
  Top Layer w0.2: U1.32@27.343,7.768 27.325,7.75 27.387,7.75 U1.32@27.433,7.796 ; U1.32 28.15,7.75 28.725,8.325 28.775,8.325 29,8.55 R9.1
NetR10_1: R10.1 U1.1 | length 1.4
  Top Layer w0.2: U1.1 26.875,9.075 27.1,9.3 R10.1
NetR11_1: R11.1 U1.10 | length 1.7
  Top Layer w0.2: R11.1@21.25,7.925 21.475,7.7 21.789,7.7 22.189,7.3 22.298,7.3 22.329,7.269 22.631,7.269 U1.10
NetR12_2: R12.2 R13.2 U2.7 | length 5.8
  Top Layer w0.2: U2.7 11.895,8.847 12.452,8.847 12.799,8.5 13.4,8.5 13.55,8.35 13.55,6.375 13.925,6 13.925,5.925 R13.2@14.15,5.7 ; R13.2@13.95,5.7 R13.2@14.15,5.7 ; R12.2@14.925,5.7 14.45,5.7 R13.2 R13.2@14.15,5.7
NetR14_2: R14.2 R16.2 U2.8 | length 10.8
  Top Layer w0.2: U2.8 12.895,9.557 13.12,9.332 v1(13.12,9.17) v1@13.075,9.125 ; R14.2 14.208,7.217 14.208,6.667 14.45,6.425 16.1,6.425 v3(16.55,6.875) 16.925,7.25 R16.2@16.925,7.75
  Bottom Layer w0.2: v1(13.12,9.17) 13.12,9.007 13.32,8.807 13.32,8.78 13.325,8.775 13.325,7.525 14.45,6.4 16.075,6.4 v3(16.55,6.875)
NetR15_1: R15.1 U1.2 | length 1.6
  Top Layer w0.2: R15.1 25.983,9.692 25.983,9.317 26.356,8.944 26.356,8.494 U1.2
NetR17_1: R17.1 U1.13 | length 1.9
  Top Layer w0.2: R17.1@21.275,6.775 21.5,6.55 21.5,6.375 22.125,5.75 U1.13
NetR18_1: R18.1 U1.15 | length 3.2
  Top Layer w0.2: R18.1 19.925,5.175 20.15,4.95 20.225,4.95 20.65,4.525 21.875,4.525 22.1,4.75 U1.15
NetR19_1: R19.1 U1.16 | length 1.6
  Top Layer w0.2: R19.1@21.275,3.75 21.345,3.82 21.783,3.82 22.193,4.231 22.631,4.231 U1.16
NetR20_1: R20.1 U2.9 | length 2.5
  Top Layer w0.2: U2.9 13.395,10.43 13.75,10.075 13.75,9.675 14.092,9.333 14.092,8.833 R20.1
NetR21_1: R21.1 U1.17 | length 4
  Top Layer w0.2: R21.1 20.075,2.225 20.3,2.45 20.3,2.525 20.65,2.875 21.525,2.875 22.175,3.525 U1.17
NetR24_2: R24.2 R26.1 U2.13 | length 2.6
  Top Layer w0.2: U2.13 13.28,12.43 13.9,13.05 14.175,13.325 14.175,14.225 R24.2@14.15,14.25
NetR29_1: R29.1 R30.2 U2.26 | length 4.4
  Top Layer w0.2: R29.1 4.425,12.675 4.65,12.45 4.725,12.45 5.375,11.8 5.55,11.8 5.775,11.575 R30.2@5.775,11.425 ; R30.2 6.352,11.5 6.922,10.93 U2.26
NRES: R11.2 U3.13 | length 36.4
  Top Layer w0.2: R11.2@19.9,8 19.9,9.456 23.494,13.05 32.558,13.05 32.633,12.975 v1(32.7,12.975) ; v1(32.765,9.8) 36.59,9.8 38.99,7.4 38.99,1.875 39.565,1.3 41.365,1.3 41.965,1.9 41.965,3.015 U3.13 U3.13@41.99,3.06
  Bottom Layer w0.2: v1@32.775,9.8 v1@32.775,13.05
OVCH: R22.1 R25.2 U2.22 | length 9.1
  Top Layer w0.2: U2.22 7.895,13.995 8.775,14.875 9.375,14.875 10.15,15.65 10.15,17.325 10.3,17.475 R22.1 11.675,17.475 11.8,17.35 11.8,16.975 12.35,16.425 12.35,16.35 12.575,16.125 R25.2
OVDIS: R27.1 R28.2 U2.24 | length 7.7
  Top Layer w0.2: U2.24 7.237,11.93 6.575,12.592 6.575,15.6 7.1,16.125 R27.1 R28.2
RF1: R4.2 U3.9 | length 6.4
  Top Layer w0.2: R4.2 33.35,6.175 34.01,5.515 U3.9@34.01,3.05
RF2: R5.2 U3.11 | length 10.5
  Top Layer w0.2: R5.2 35.5,7.375 38.01,4.865 U3.11@38.01,3.05
RF3: R9.2 U3.10 | length 10.8
  Top Layer w0.2: R9.2 v1(35.25,8.625) ; v1(35.965,5.325) 35.965,3.085 U3.10
  Bottom Layer w0.2: v1(35.25,8.625) 35.8,8.075 35.825,8.075 36,7.9 36,5.35 v1@35.975,5.325
RF4: R10.2 U3.4 | length 17.2
  Top Layer w0.2: R10.2 35.325,11.175 37.975,13.825 37.975,19.015 U3.4@38.01,19.05
RF5: R15.2 U3.12 | length 20.7
  Top Layer w0.2: R15.2 25.85,10.617 25.967,10.5 36.9,10.5 40.425,6.975 40.425,4.85 40.01,4.435 U3.12@40.01,3.05
SCK: R21.2 U3.6 | length 33.6
  Top Layer w0.2: v1(18.85,0.875) R21.2 ; v1(33.99,13.65) 34,13.66 U3.6
  Bottom Layer w0.2: v1(18.85,0.875) 19.012,0.875 19.287,0.6 26.624,0.6 27.499,1.475 32.775,1.475 34,2.7 v1@34,13.65
SHUTDOWN: U2.20
TEMP: R31.2 U4.3 | length 35.1
  Top Layer w0.2: U4.3 16.6,15.826 16.976,15.45 18.225,15.45 19.1,14.575 19.125,14.575 v1(20.125,13.575) ; R31.2 26.6,0.9 26.8,0.7 v1(27.625,0.7) 32.325,0.7 33,1.375 33,4.425 v1(32.15,5.275)
  Bottom Layer w0.2: v1(20.125,13.575) 30.25,13.575 31.5,12.325 31.5,5.925 v1(32.15,5.275)
VBAT: J2.1 U2.16 | length 8.6
  Top Layer w0.2: U2.16 11.395,14.23 11.495,14.33 11.495,14.396 11.949,14.85 12.6,14.85 13.496,15.746 13.496,18.679 12.85,19.325 J2.1
VBOOST: C11.2 U2.1 | length 7.9
  Top Layer w0.2: v1(5.6,4.4) C11.2@5.6,5.6 ; v1(6.975,8.2) 7.705,8.93 U2.1
  Bottom Layer w0.2: v1(5.6,4.4) 5.6,7.05 6.673,8.123 6.898,8.123 v1(6.975,8.2)
VBUCK: C12.2 L1.2 R2.2 R12.1 R14.1 R20.2 R22.2 R23.1 U2.2 U2.10 U2.12 U2.18 | length 49.3
  Top Layer w0.2: v1(8.125,7.975) 8.816,7.975 9.101,8.259 9.101,8.265 9.395,8.559 U2.2 ; U2.18 10.395,14.77 10.925,15.3 10.925,16.1 R22.2 ; U2.10 13.195,10.93 13.2,10.925 14.217,10.925 14.377,10.765 v1(14.485,10.765) 15.525,9.725 R20.2 R14.1 ; U2.12 13.868,11.93 14.113,12.175 v1(14.071,12.175) ; R2.2@17.525,5.675 R2.2 R23.1 v1(18.8,6.575)
  Top Layer w0.5: L1.2@8.6,2.2 9,1.8 10.15,1.8 10.775,1.175 12.9,1.175 13.25,1.525 C12.2 ; C12.2@13.25,1.7 13.193,1.643 14.318,1.643 v1(15.15,2.475) R12.1@15.15,4.35 ; R20.2 15.525,8.799 15.6,8.874 16.318,8.874 16.444,9 v1(16.525,9)
  Bottom Layer w0.2: v1(8.125,7.975) 8.65,7.975 9.45,8.775 9.45,9.275 9.8,9.625 12.05,9.625 13.19,10.765 v1(14.485,10.765) 14.485,11.957 14.3,12.142 14.267,12.175 v1(14.071,12.175) 13.35,12.175 12.125,13.4 11.475,13.4 10.675,14.2 v1(10.675,15.104) ; v1(16.525,9) 16.525,8.85 v1(18.8,6.575)
  Bottom Layer w0.5: v1(15.15,2.475) 15.15,4.4 15.725,4.975 18.2,4.975 18.8,5.575 v1(18.8,6.575)
VCC_H: C4.2 C8.2 R24.1 U2.14 U3.2 | length 42.2
  Top Layer w0.2: U2.14 12.895,14.52 13.875,15.5 13.95,15.5 14.175,15.725 C8.2 14.708,15.8 14.825,15.683 14.825,15.25 15.2,14.875 15.275,14.875 15.5,14.65 R24.1@15.5,14.575 ; C4.2 41.525,20.65 41.942,20.233 U3.2@41.942,19.118 ; U3.2@41.932,19.118 U3.2
  Top Layer w0.5: C8.2 14.175,17.282 14.468,17.575 18.725,17.575 21.85,14.45 v1(26.4,14.45) ; v1(40.665,15.55) 41.932,16.817 U3.2@41.932,19.118
  Bottom Layer w0.5: v1(26.4,14.45) 27.5,15.55 v1@40.675,15.55
VCC_L: C1.2 C3.2 C6.2 C9.2 C10.2 U1.4 U1.6 U1.18 U1.29 U2.11 U4.4 | length 45.3
  Top Layer w0.2: U2.11 15.68,11.43 C9.2@15.8,11.55 ; U4.4 16.6,13.875 C10.2@16.725,13.75 ; C1.2 23.675,2.6 23.875,2.8 U1.18 ; C6.2 24.461,9.8 24.461,9.579 24.525,9.516 24.746,9.516 25.325,8.936 25.325,8.827 25.375,8.777 U1.4 ; U1.6 C6.2@24.375,9.625 ; U1.29@27.325,6.25 U1.29@27.617,6.25 ; U1.29 27.902,6.25 27.952,6.2 28.061,6.2 28.325,5.936 28.325,5.625 28.7,5.25 28.775,5.25 29,5.025 C3.2 v1(29,3.9)
  Top Layer w0.3: C9.2 15.9,11.3 16.475,11.3 ; C9.2@16.076,11.676 C9.2@16.149,11.749 ; C10.2@16.625,13.5 C10.2 ; C10.2@16.725,13.75 C10.2 ; v1(17.4,11.575) 17.349,11.575 17.074,11.3 16.475,11.3 ; 16.475,11.3 16.725,11.55 C10.2
  Top Layer w0.5: C9.2 C9.2@15.975,11.575 ; v1(22.75,2.825) 23.6,1.975 23.6,1.85 C1.2 ; C6.2 v1(24.3,10.925)
  Bottom Layer w0.5: v1(17.4,11.575) 17.4,11.675 18.425,12.7 22.525,12.7 v1(24.3,10.925) 25.775,9.45 28.075,9.45 29,8.525 v1(29,3.9) 28.919,3.9 28.594,4.225 24.15,4.225 v1(22.75,2.825)
pads on no net: U1.7 U1.8 U1.9 U1.11 U1.12 U1.14 U1.19 U1.20 U1.22 U1.24 U1.25 U1.26 U1.27 U1.28 U4.1 U4.6

## Polygon pours and split planes (outlines as drawn)
GND on Top Layer "Top Layer-GND" (solid, pour order 4): 0,-1.5 50,-1.5 50,23.5 0,23.5
GND on Bottom Layer "Top Layer-GND" (solid, pour order 5): 0,-1.5 50,-1.5 50,23.5 0,23.5

## Silkscreen, mask and mechanical layers (free items; w line width, h text height)
Top Overlay:
  lines w0.254: 8.45,-0.05 9.775,-0.05 10.95,1.125 10.95,2.4 ; 9.8,0.65 10.45,1.3 10.45,5.925 ; 10.775,8.425 10.775,8.7 10.805,8.73 12.395,8.73 12.4,8.725 13.575,8.725 ; 11.1,0.3 11.75,0.95 11.75,5.275 12.35,5.875 12.35,6 ; 12.15,0.95 12.15,1.65 12.5,2 12.5,2.9 ; 13.55,4.125 13.55,4.75 13.825,5.025 ; 15.75,4.525 15.75,4.2 16.525,3.425 16.9,3.425 ; 19.025,12.675 19.45,13.1 19.45,14.625 ; 22.825,17.275 18.1,17.275 ; 18.1,17.275 18.075,17.3 15.525,17.3 13.725,17.3 13.7,17.275 13.7,16.75 13.7,12.9 13.725,12.875 16.65,12.875 16.675,12.85 18.5,12.85 18.6,12.95 18.6,14.3 18.1,14.3 18.1,17.275 ; 25.325,19.275 25.325,17.775 25.425,17.675 28.275,17.675 28.35,17.6 28.35,16.525 29.225,16.525 29.55,16.2 29.55,15.025 29.35,14.825 22.9,14.825 22.9,14.85 22.9,19.275 25.325,19.275 ; 25.325,19.275 25.325,19.275
Mechanical 1:
  the board outline again, w1

## Dimensions
50,23.5 to 50,-1.5 on Mechanical 13
0,23.5 to 50,23.5 on Mechanical 18

## Text inside footprints (layer, text, board x,y; h text height)
C14: Bottom Overlay "+" at 22.35,12.95 h1.22 r90